# Altium PCB STM32F4.PcbDoc
Units mm, origin at the board's own origin, x right, y up, seen from the top; angles counter-clockwise.
Board outline 152.4 x 101.6 mm, 2 copper layers (Top Layer, Bottom Layer); 100 components, 104 nets, 539 pads, 0 vias.
Unrouted connection lines stored in the file: 299.
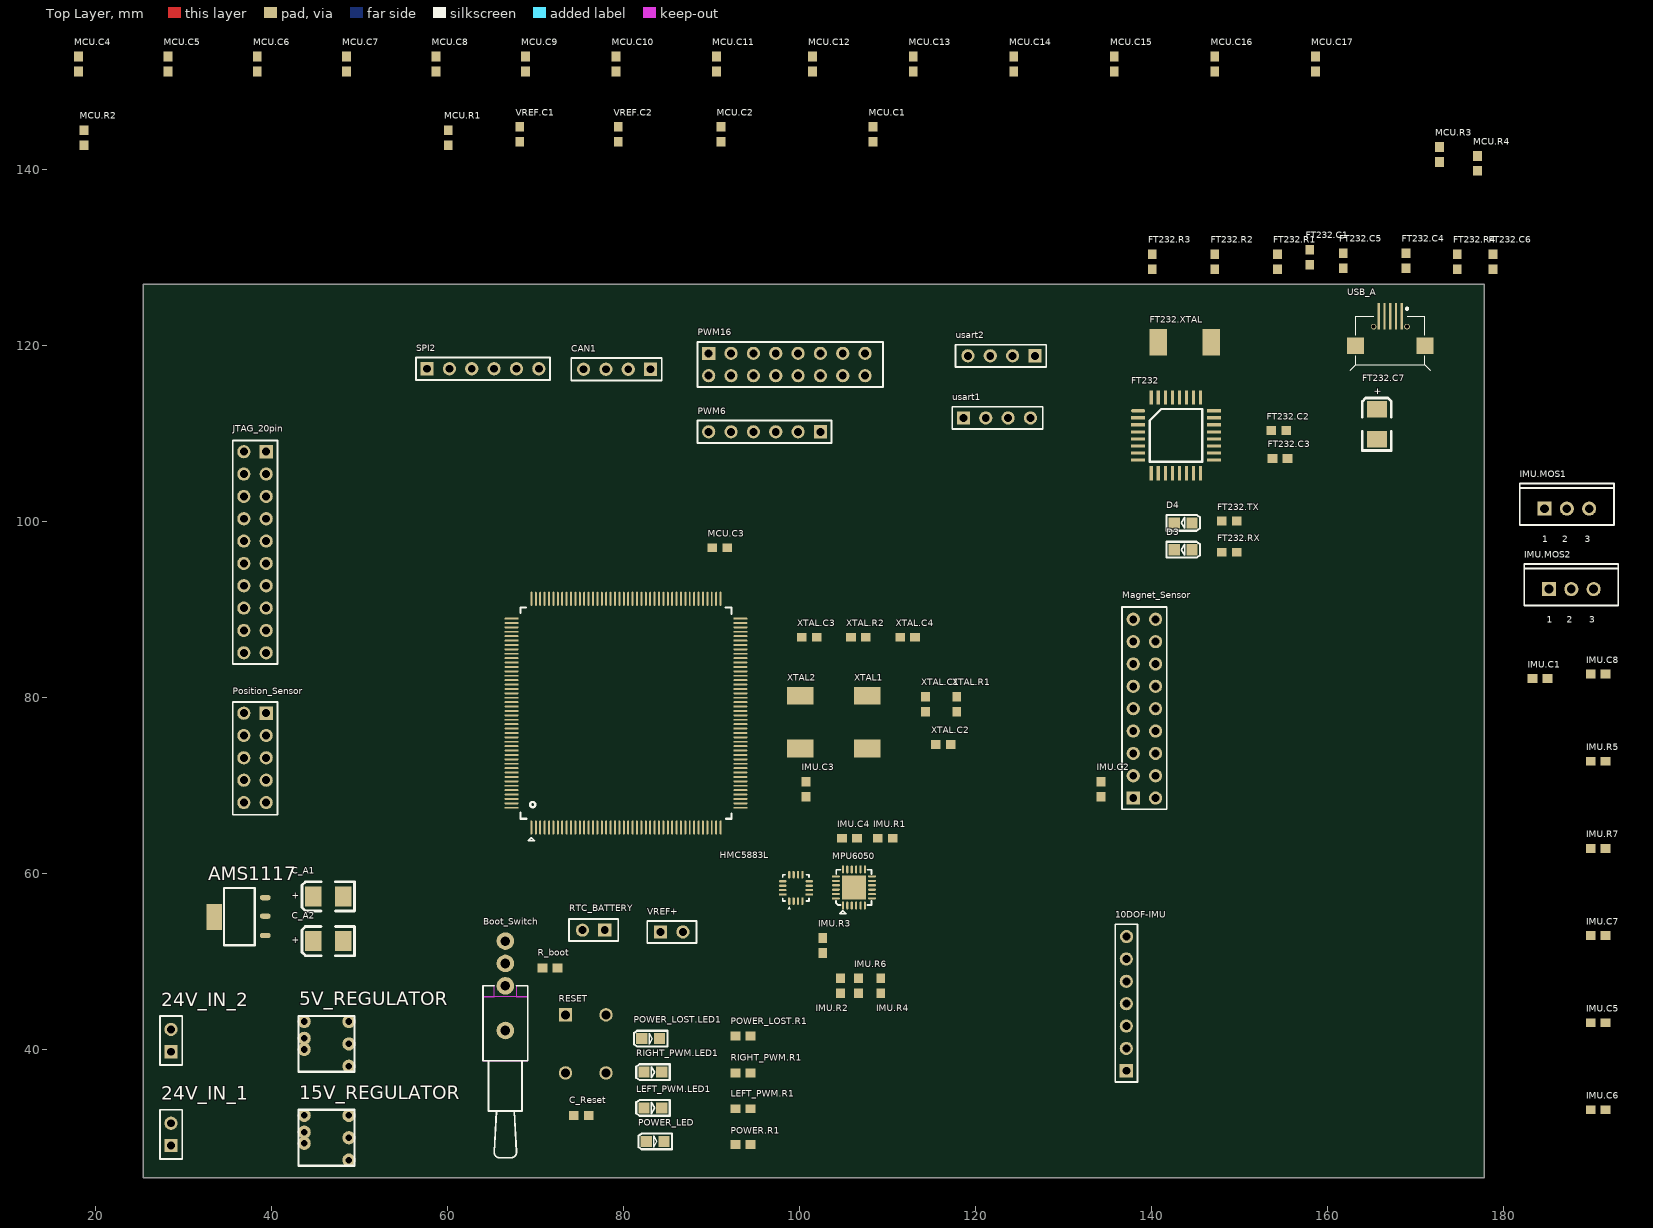
[diagram p0: Top Layer view]
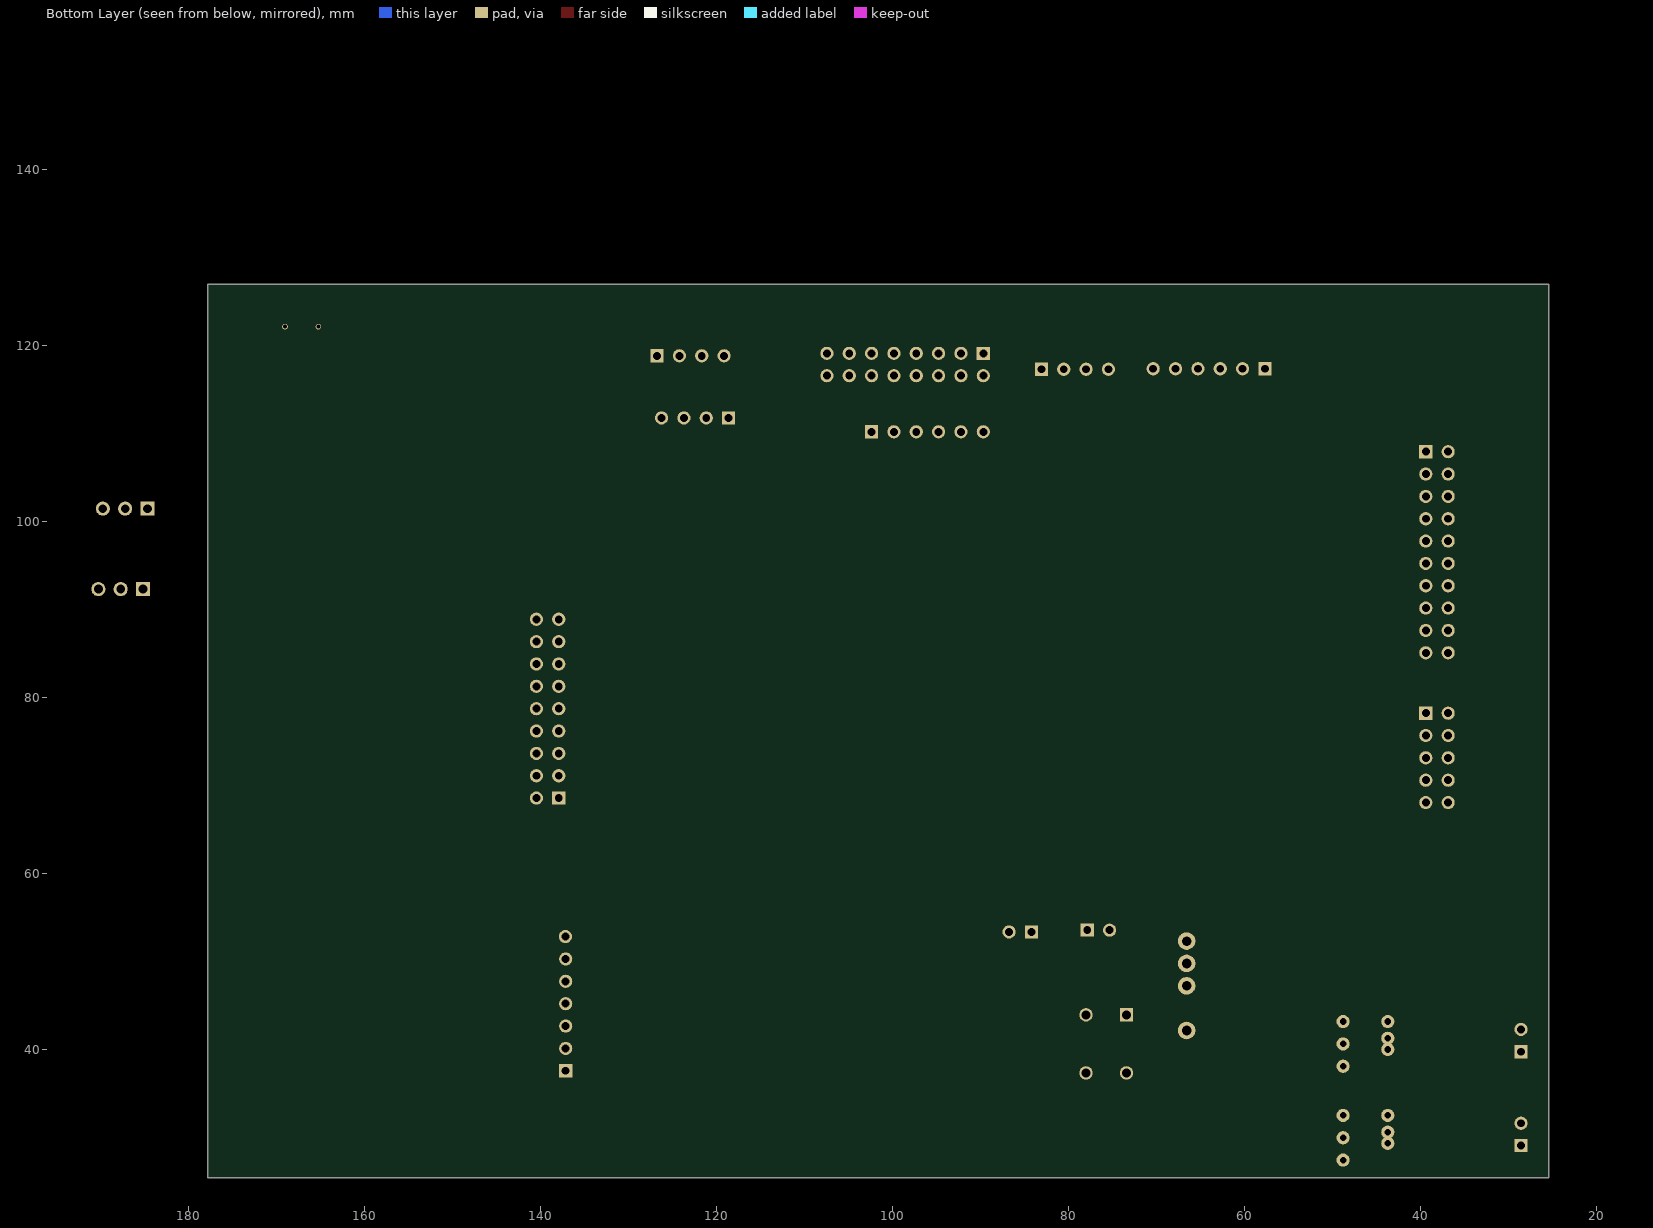
[diagram p1: Bottom Layer view, seen from below]

## Layer stack, top to bottom
Top Layer: signal copper 0.0356
Dielectric: dielectric 0.32, FR-4, Dk 4.8
Bottom Layer: signal copper 0.0356

## Board outline
25.4,25.4 177.8,25.4 177.8,127 25.4,127

## Design rules (kind name [scope] priority, off if disabled: settings)
Clearance [All] p1: gap=0.127
ComponentClearance [All] p1: gap=0.178 collisioncheckmode=3 verticalgap=0.178 showdistances=FALSE
HoleToHoleClearance [All] p1: gap=0.178 allowstackedmicrovias=TRUE
MinimumSolderMaskSliver [All] p1: minsoldermaskwidth=0
PolygonConnect [All] p1: connectstyle=Relief reliefconductorwidth=0.254 reliefentries=4 polygonreliefangle="90 Angle"
RoutingVias [All] p1: holewidth=0.711 width=1.27 viastyle="Through Hole" minholewidth=0.711 minwidth=1.27 maxholewidth=0.711 maxwidth=1.27
SilkToSilkClearance [All] p1: silktosilkclearance=0
SilkscreenOverComponentPads [All] p1: minsilkscreentomaskgap=0
SolderMaskExpansion [All] p1: expansion=0.102
TestPointUsage [All] p1: valid=0 allowmultiple=FALSE
Testpoint [All] p1: side=15 testpointundercomponent=TRUE minsize=1.016 maxsize=2.54 preferedsize=1.524 minholesize=0 maxholesize=1.016 preferedholesize=0.813 testpointgrid=0.025 style=1023 order=0-112345678
Width [All] p1: maxlimit=2.032 minlimit=0.203 preferedwidth=0.254
19 further rules are at their usual default settings.

## Components (designator, comment, footprint, x,y, rotation, side; value= is the part's Value field where it differs from the comment)
5V_REGULATOR "5V_REGULATOR" URA 46.228,40.64 r90 top
10DOF-IMU "*" HEADER7 137.16,45.212 r90 top
15V_REGULATOR "15V_REGULATOR" URA 46.228,29.972 r90 top
24V_IN_1 "*" Header2 28.448,30.48 r90 top
24V_IN_2 "*" Header2 28.448,41.148 r90 top
AMS1117 "AMS1117" AMS1117 36.068,54.864 r90 top
Boot_Switch "SW-SPDT" TL36WW15050 66.548,47.244 r270 top
C_A1 "Cap Pol2" 3528C/B 44.704,57.404 r0 top
C_A2 "Cap Pol2" 3528C/B 44.704,52.324 r0 top
C_Reset "Cap Semi" 1608[0603] 75.184,32.512 r0 top
CAN1 "CAN1" HEADER4 79.248,117.348 r180 top
D3 "LED3" LED 146.304,96.012 r180 top
D4 "LED0" LED 146.304,99.06 r180 top
FT232 "FT232" FT232 142.748,109.728 r0 top
FT232.C1 "33nF" 1608[0603] 157.988,130.048 r90 top
FT232.C2 "27pF" 1608[0603] 154.471,110.363 r0 top
FT232.C3 "27pF" 1608[0603] 154.598,107.188 r0 top
FT232.C4 "100nF" 1608[0603] 168.91,129.667 r90 top
FT232.C5 "100nF" 1608[0603] 161.798,129.667 r90 top
FT232.C6 "100nF" 1608[0603] 178.816,129.54 r270 top
FT232.C7 "Cap Pol2" 3528C/B 165.608,112.776 r270 top
FT232.R1 "Res Semi" J1-0603 154.305,129.54 r90 top
FT232.R2 "Res Semi" J1-0603 147.193,129.54 r90 top
FT232.R3 "Res Semi" J1-0603 140.081,129.54 r90 top
FT232.R4 "Res1" 1608[0603] 174.752,129.54 r90 top
FT232.RX "Res1" 1608[0603] 148.844,96.52 r180 top
FT232.TX "Res1" 1608[0603] 148.844,100.076 r180 top
FT232.XTAL "6MHz" xtal 143.764,120.396 r0 top
HMC5883L "HMC5883L" HMC5883L 99.568,58.42 r0 top
IMU.C1 "Cap Semi" 1608[0603] 184.15,82.169 r0 top
IMU.C2 "Cap Semi" 1608[0603] 134.239,69.596 r90 top
IMU.C3 "Cap Semi" 1608[0603] 100.711,69.596 r90 top
IMU.C4 "Cap Semi" 1608[0603] 105.664,64.008 r0 top
IMU.C5 "Cap Semi" 1608[0603] 190.754,43.053 r0 top
IMU.C6 "Cap Semi" 1608[0603] 190.754,33.147 r0 top
IMU.C7 "Cap Semi" 1608[0603] 190.754,52.959 r0 top
IMU.C8 "Cap Semi" 1608[0603] 190.754,82.677 r0 top
IMU.MOS1 "NDC7002N" TO-220AB 187.198,101.473 r0 top
IMU.MOS2 "NDC7002N" TO-220AB 187.706,92.329 r0 top
IMU.R1 "Res Semi" J1-0603 109.728,64.008 r180 top
IMU.R2 "Res Semi" J1-0603 104.648,47.244 r90 top
IMU.R3 "Res Semi" J1-0603 102.616,51.816 r270 top
IMU.R4 "Res Semi" J1-0603 109.22,47.244 r90 top
IMU.R5 "Res Semi" J1-0603 190.754,72.771 r0 top
IMU.R6 "Res Semi" J1-0603 106.68,47.244 r90 top
IMU.R7 "Res Semi" J1-0603 190.754,62.865 r0 top
JTAG_20pin "*" JTAG 38.1,96.52 r270 top
LEFT_PWM.LED1 "LED1" LED 80.606,34.163 r0 top
LEFT_PWM.R1 "Res Semi" J1-0603 93.56,33.274 r180 top
Magnet_Sensor "Magnet_Sensor" HEADER18 139.192,78.74 r90 top
MCU.C1 "Cap Semi" 1608[0603] 108.331,144.018 r90 top
MCU.C2 "Cap Semi" 1608[0603] 91.059,144.018 r90 top
MCU.C3 "Cap Semi" 1608[0603] 90.932,97.028 r180 top
MCU.C4 "Cap Semi" 1608[0603] 18.034,152.019 r90 top
MCU.C5 "Cap Semi" 1608[0603] 28.194,152.019 r90 top
MCU.C6 "Cap Semi" 1608[0603] 38.354,152.019 r90 top
MCU.C7 "Cap Semi" 1608[0603] 48.514,152.019 r90 top
MCU.C8 "Cap Semi" 1608[0603] 58.674,152.019 r90 top
MCU.C9 "Cap Semi" 1608[0603] 68.834,152.019 r90 top
MCU.C10 "Cap Semi" 1608[0603] 79.121,152.019 r90 top
MCU.C11 "Cap Semi" 1608[0603] 90.551,152.019 r90 top
MCU.C12 "Cap Semi" 1608[0603] 101.473,152.019 r90 top
MCU.C13 "Cap Semi" 1608[0603] 112.903,152.019 r90 top
MCU.C14 "Cap Semi" 1608[0603] 124.333,152.019 r90 top
MCU.C15 "Cap Semi" 1608[0603] 135.763,152.019 r90 top
MCU.C16 "Cap Semi" 1608[0603] 147.193,152.019 r90 top
MCU.C17 "Cap Semi" 1608[0603] 158.623,152.019 r90 top
MCU.R1 "Res Semi" J1-0603 60.071,143.637 r90 top
MCU.R2 "Res Semi" J1-0603 18.669,143.637 r90 top
MCU.R3 "Res Semi" J1-0603 172.72,141.732 r90 top
MCU.R4 "Res Semi" J1-0603 177.038,140.716 r90 top
MPU6050 "*" MPU6050 106.172,58.42 r90 top
Position_Sensor "Position_Sensor" HEADER10 38.1,73.152 r270 top
POWER.R1 "Res Semi" J1-0603 93.56,29.21 r180 top
POWER_LED "LED1" LED 80.86,30.353 r0 top
POWER_LOST.LED1 "LED1" LED 80.352,42.037 r0 top
POWER_LOST.R1 "Res Semi" J1-0603 93.56,41.529 r180 top
PWM6 "Header 6" HEADER6 96.012,110.236 r180 top
PWM16 "PWM16" HEADER16 98.552,117.856 r0 top
R_boot "47k" J1-0603 71.628,49.276 r0 top
RESET "6x4.5mm Button" Switch 75.692,40.64 r0 top
RIGHT_PWM.LED1 "LED1" LED 80.606,38.227 r0 top
RIGHT_PWM.R1 "Res Semi" J1-0603 93.56,37.338 r180 top
RTC_BATTERY "*" Header2 76.454,53.467 r180 top
SPI2 "SPI2" HEADER6 64.008,117.348 r0 top
usart1 "Usart1" HEADER4 122.428,111.76 r0 top
usart2 "Usart2" HEADER4 122.936,118.872 r180 top
USB_A "USB_A" Micro_USB 167.132,117.856 r270 top
VREF+ "*" Header2 85.598,53.467 r0 top
VREF.C1 "Cap Semi" 1608[0603] 68.199,144.018 r90 top
VREF.C2 "Cap Semi" 1608[0603] 79.375,144.018 r90 top
XTAL1 "32.678KHz" xtal 107.696,77.216 r90 top
XTAL2 "8MHz" xtal 100.076,77.216 r270 top
XTAL.C1 "Cap Semi" 1608[0603] 114.3,79.248 r90 top
XTAL.C2 "Cap Semi" 1608[0603] 116.332,74.676 r0 top
XTAL.C3 "Cap Semi" 1608[0603] 101.092,86.868 r180 top
XTAL.C4 "Cap Semi" 1608[0603] 112.268,86.868 r180 top
XTAL.R1 "Res Semi" J1-0603 117.856,79.248 r90 top
XTAL.R2 "Res Semi" J1-0603 106.68,86.868 r180 top
? "*" U-LQFP176-0.5 80.264,78.232 r0 top

## Footprints (in the part's own frame and the unit in brackets; to place one, negate y for a bottom-side part, rotate by r counter-clockwise, add the part's x,y. Pads: shape width x height; smd on the part's side, far side on the other; paste and mask are expansions set on the pad)
1608[0603] [mm] "Chip Capacitor; Body 1.6 x 0.8 mm (LxW typ)"
  rect 1.1x1 smd: 1(-0.85,0) 2(0.85,0)
3528C/B [mm]
  rect 1.9x2.28 smd: 1(0,0) 2(3.42,0)
  silkscreen extent -1.27,-1.65 4.7,1.65
AMS1117 [mm]
  rrect100% 0.604x1.231 smd mask+0.07: 1(-1.9,-3.2) 2(0.3,-3.2) 3(2.4,-3.2)
  rect 3x1.75 smd mask+0.07: 4(0.2,2.6)
  silkscreen extent -3,-2 3.5,1.5
FT232 [mm]
  oval 1.6x0.37 smd: 1(-4.274,2.87)
  rect 1.6x0.37 smd: 2(-4.274,2.07) 3(-4.274,1.27) 4(-4.274,0.47) 5(-4.274,-0.33) 6(-4.274,-1.13) 7(-4.274,-1.93) 8(-4.274,-2.73) 17(4.326,-2.73) 18(4.326,-1.93) 19(4.326,-1.13) 20(4.326,-0.33) 21(4.326,0.47) 22(4.326,1.27) 23(4.326,2.07) 24(4.326,2.87)
  rect 0.37x1.6 smd: 9(-2.774,-4.23) 10(-1.974,-4.23) 11(-1.174,-4.23) 12(-0.374,-4.23) 13(0.426,-4.23) 14(1.226,-4.23) 15(2.026,-4.23) 16(2.826,-4.23) 25(2.826,4.37) 26(2.026,4.37) 27(1.226,4.37) 28(0.426,4.37) 29(-0.374,4.37) 30(-1.174,4.37) 31(-1.974,4.37) 32(-2.774,4.37)
  silkscreen extent -2.97,-2.92 3.02,3.06
Header2 [mm]
  rect 1.5x1.5 hole 0.9: 1(-1.399,-0.101)
  round 1.5 hole 0.9: 2(1.141,-0.101)
  silkscreen extent -2.92,-1.37 2.67,1.14
HEADER4 [mm]
  rect 1.5x1.5 hole 0.9: 1(-3.812,0.026)
  round 1.5 hole 0.9: 2(-1.272,0.026) 3(1.268,0.026) 4(3.808,0.026)
  silkscreen extent -5.08,-1.24 5.21,1.3
HEADER6 [mm]
  rect 1.5x1.5 hole 0.9: 1(-6.352,0.026)
  round 1.5 hole 0.9: 2(-3.812,0.026) 3(-1.272,0.026) 4(1.268,0.026) 5(3.808,0.026) 6(6.348,0.026)
  silkscreen extent -7.62,-1.24 7.62,1.3
HEADER7 [mm]
  rect 1.5x1.5 hole 0.9: 1(-7.622,0.026)
  round 1.5 hole 0.9: 2(-5.082,0.026) 3(-2.542,0.026) 4(-0.002,0.026) 5(2.538,0.026) 6(5.078,0.026) 7(7.62,0)
  silkscreen extent -8.89,-1.24 9.02,1.3
HEADER10 [mm]
  rect 1.5x1.5 hole 0.9: 1(-5.08,1.27)
  round 1.5 hole 0.9: 2(-5.08,-1.27) 3(-2.54,1.27) 4(-2.54,-1.27) 5(0,1.27) 6(0,-1.27) 7(2.54,1.27) 8(2.54,-1.27) 9(5.08,1.27) 10(5.08,-1.27)
  silkscreen extent -6.35,-2.54 6.48,2.57
HEADER16 [mm]
  rect 1.5x1.5 hole 0.9: 1(-8.89,1.27)
  round 1.5 hole 0.9: 2(-8.89,-1.27) 3(-6.35,1.27) 4(-6.35,-1.27) 5(-3.81,1.27) 6(-3.81,-1.27) 7(-1.27,1.27) 8(-1.27,-1.27) 9(1.27,1.27) 10(1.27,-1.27) 11(3.81,1.27) 12(3.81,-1.27) 13(6.35,1.27) 14(6.35,-1.27) 15(8.89,1.27) 16(8.89,-1.27)
  silkscreen extent -10.16,-2.54 10.92,2.57
HEADER18 [mm]
  rect 1.5x1.5 hole 0.9: 1(-10.16,1.27)
  round 1.5 hole 0.9: 2(-10.16,-1.27) 3(-7.62,1.27) 4(-7.62,-1.27) 5(-5.08,1.27) 6(-5.08,-1.27) 7(-2.54,1.27) 8(-2.54,-1.27) 9(0,1.27) 10(0,-1.27) 11(2.54,1.27) 12(2.54,-1.27) 13(5.08,1.27) 14(5.08,-1.27) 15(7.62,1.27) 16(7.62,-1.27) 17(10.16,1.27) 18(10.16,-1.27)
  silkscreen extent -11.43,-2.54 11.56,2.57
HMC5883L [mil]
  oval 10x34 smd: 1(-29.53,-61.02) 2(-9.84,-61.02) 3(9.84,-61.02) 4(29.53,-61.02) 9(29.53,57.09) 10(9.84,57.09) 11(-9.84,57.09) 12(-29.53,57.09)
  oval 34x10 smd: 5(60.12,-31.5) 6(60.12,-11.81) 7(60.12,7.87) 8(60.12,27.56) 13(-59.06,27.56) 14(-59.06,7.87) 15(-59.06,-11.81) 16(-59.06,-31.5)
  silkscreen extent -59,-99 59,57
J1-0603 [mm] "Chip Resistor; Body 1.6 x 0.8 mm (LxW typ)"
  rect 1.1x1 smd: 1(-0.85,0) 2(0.85,0)
JTAG [mm]
  rect 1.5x1.5 hole 0.9: 1(-11.43,1.27)
  round 1.5 hole 0.9: 2(-11.43,-1.27) 3(-8.89,1.27) 4(-8.89,-1.27) 5(-6.35,1.27) 6(-6.35,-1.27) 7(-3.81,1.27) 8(-3.81,-1.27) 9(-1.27,1.27) 10(-1.27,-1.27) 11(1.27,1.27) 12(1.27,-1.27) 13(3.81,1.27) 14(3.81,-1.27) 15(6.35,1.27) 16(6.35,-1.27) 17(8.89,1.27) 18(8.89,-1.27) 19(11.43,1.27) 20(11.43,-1.27)
  silkscreen extent -12.7,-2.54 12.7,2.57
LED [mm]
  rect 1.27x1.27 smd: 1(1.7,-0.8) 2(3.732,-0.8)
  silkscreen extent 0.81,-1.69 4.62,0.09
Micro_USB [mm]
  rect 3x0.25 smd: 1(-5.508,-1.3) 2(-5.508,-0.65) 3(-5.508,0) 4(-5.508,0.65) 5(-5.508,1.3)
  round 0.635 hole 0.457 unplated: MH1(-4.3,1.9) MH2(-4.3,-1.9)
  rect 1.9x1.9 smd: ""(-2.15,3.95) ""(-2.15,-3.95)
  silkscreen extent -6.47,-4.57 0.63,4.57
MPU6050 [mm]
  rect 0.9x0.25 smd: 1(-2.05,1.25)
  oval 0.9x0.25 smd: 2(-2.05,0.75) 3(-2.05,0.25) 4(-2.05,-0.25) 5(-2.05,-0.75) 6(-2.05,-1.25) 13(2.05,-1.25) 14(2.05,-0.75) 15(2.05,-0.25) 16(2.05,0.25) 17(2.05,0.75) 18(2.05,1.25)
  oval 0.25x0.9 smd: 7(-1.25,-2.05) 8(-0.75,-2.05) 9(-0.25,-2.05) 10(0.25,-2.05) 11(0.75,-2.05) 12(1.25,-2.05) 19(1.25,2.05) 20(0.75,2.05) 21(0.25,2.05) 22(-0.25,2.05) 23(-0.75,2.05) 24(-1.25,2.05)
  rect 2.7x2.7 smd: 25(0,0)
  silkscreen extent -3,-2 2,2.03
Switch [mm]
  round 1.524 hole 1: 1(-2.3,-3.3) 2(2.3,-3.3) 2(2.3,3.3)
  rect 1.524x1.524 hole 1: 1(-2.3,3.3)
TL36WW15050 [mm] "SPDT Subminiature Toggle Switch, Right Angle Mounting, Vertical Actuation"
  round 2 hole 1.1: 1(0,0) 2(-2.54,0) 3(-5.08,0) M(5.08,0)
  Top Layer keep-out region: 1.27,2.54 1.27,-2.54 8.509,-2.54 8.509,2.54
  Top Layer keep-out region: 0,2.54 0,1.27 1.27,1.27 1.27,2.54
  Top Layer keep-out region: 0,-1.27 0,-2.54 1.27,-2.54 1.27,-1.27
  silkscreen extent 0,-2.54 19.56,2.54
TO-220AB [mm] "TO, Thru-Hole, Vertical, Heatsink Mounted; 3 In-Line Leads; Pitch 2.54 mm"
  rect 1.6x1.6 hole 1: 1(-2.54,0)
  round 1.6 hole 1: 2(0,0) 3(2.54,0)
  silkscreen extent -5.35,-1.85 5.35,2.85
U-LQFP176-0.5 [mm]
  oval 0.22x1.6 smd: 1(-10.75,-13) 2(-10.25,-13) 3(-9.75,-13) 4(-9.25,-13) 5(-8.75,-13) 6(-8.25,-13) 7(-7.75,-13) 8(-7.25,-13) 9(-6.75,-13) 10(-6.25,-13) 11(-5.75,-13) 12(-5.25,-13) 13(-4.75,-13) 14(-4.25,-13) 15(-3.75,-13) 16(-3.25,-13) 17(-2.75,-13) 18(-2.25,-13) 19(-1.75,-13) 20(-1.25,-13) 21(-0.75,-13) 22(-0.25,-13) 23(0.25,-13) 24(0.75,-13) 25(1.25,-13) 26(1.75,-13) 27(2.25,-13) 28(2.75,-13) 29(3.25,-13) 30(3.75,-13) 31(4.25,-13) 32(4.75,-13) 33(5.25,-13) 34(5.75,-13) 35(6.25,-13) 36(6.75,-13) 37(7.25,-13) 38(7.75,-13) 39(8.25,-13) 40(8.75,-13) 41(9.25,-13) 42(9.75,-13) 43(10.25,-13) 44(10.75,-13) 89(10.75,13) 90(10.25,13) 91(9.75,13) 92(9.25,13) 93(8.75,13) 94(8.25,13) 95(7.75,13) 96(7.25,13) 97(6.75,13) 98(6.25,13) 99(5.75,13) 100(5.25,13) 101(4.75,13) 102(4.25,13) 103(3.75,13) 104(3.25,13) 105(2.75,13) 106(2.25,13) 107(1.75,13) 108(1.25,13) 109(0.75,13) 110(0.25,13) 111(-0.25,13) 112(-0.75,13) 113(-1.25,13) 114(-1.75,13) 115(-2.25,13) 116(-2.75,13) 117(-3.25,13) 118(-3.75,13) 119(-4.25,13) 120(-4.75,13) 121(-5.25,13) 122(-5.75,13) 123(-6.25,13) 124(-6.75,13) 125(-7.25,13) 126(-7.75,13) 127(-8.25,13) 128(-8.75,13) 129(-9.25,13) 130(-9.75,13) 131(-10.25,13) 132(-10.75,13)
  oval 1.6x0.22 smd: 45(13,-10.75) 46(13,-10.25) 47(13,-9.75) 48(13,-9.25) 49(13,-8.75) 50(13,-8.25) 51(13,-7.75) 52(13,-7.25) 53(13,-6.75) 54(13,-6.25) 55(13,-5.75) 56(13,-5.25) 57(13,-4.75) 58(13,-4.25) 59(13,-3.75) 60(13,-3.25) 61(13,-2.75) 62(13,-2.25) 63(13,-1.75) 64(13,-1.25) 65(13,-0.75) 66(13,-0.25) 67(13,0.25) 68(13,0.75) 69(13,1.25) 70(13,1.75) 71(13,2.25) 72(13,2.75) 73(13,3.25) 74(13,3.75) 75(13,4.25) 76(13,4.75) 77(13,5.25) 78(13,5.75) 79(13,6.25) 80(13,6.75) 81(13,7.25) 82(13,7.75) 83(13,8.25) 84(13,8.75) 85(13,9.25) 86(13,9.75) 87(13,10.25) 88(13,10.75) 133(-13,10.75) 134(-13,10.25) 135(-13,9.75) 136(-13,9.25) 137(-13,8.75) 138(-13,8.25) 139(-13,7.75) 140(-13,7.25) 141(-13,6.75) 142(-13,6.25) 143(-13,5.75) 144(-13,5.25) 145(-13,4.75) 146(-13,4.25) 147(-13,3.75) 148(-13,3.25) 149(-13,2.75) 150(-13,2.25) 151(-13,1.75) 152(-13,1.25) 153(-13,0.75) 154(-13,0.25) 155(-13,-0.25) 156(-13,-0.75) 157(-13,-1.25) 158(-13,-1.75) 159(-13,-2.25) 160(-13,-2.75) 161(-13,-3.25) 162(-13,-3.75) 163(-13,-4.25) 164(-13,-4.75) 165(-13,-5.25) 166(-13,-5.75) 167(-13,-6.25) 168(-13,-6.75) 169(-13,-7.25) 170(-13,-7.75) 171(-13,-8.25) 172(-13,-8.75) 173(-13,-9.25) 174(-13,-9.75) 175(-13,-10.25) 176(-13,-10.75)
  silkscreen extent -12,-14.5 12,12
URA [mm]
  round 1.5 hole 0.75 paste+0.1 mask+0.1: 1(0.635,2.54) 2(-0.635,2.54) 3(-2.54,-2.54) 4(0,-2.54) 5(2.54,-2.54) 6(2.54,2.54)
  silkscreen extent -3.18,-3.18 3.18,3.18
xtal [mm]
  rect 2x3 smd: 1(-3,0) 2(3,0)

## Part data
5V_REGULATOR: library part 5V_REGULATOR_1, "Header, 6-Pin"
10DOF-IMU: library part 10DOF-IMU
15V_REGULATOR CAN1 Magnet_Sensor Position_Sensor PWM16 SPI2: "Header, 6-Pin"
24V_IN_1 24V_IN_2: library part 24V_IN
Boot_Switch: "SPDT Subminiature Toggle Switch, Right Angle Mounting, Vertical Actuation"
C_A1 C_A2 FT232.C7: "Polarized Capacitor (Axial)"
C_Reset IMU.C1 IMU.C2 IMU.C3 IMU.C4 IMU.C5 IMU.C6 IMU.C7 IMU.C8 MCU.C1 MCU.C2 MCU.C3 MCU.C4 MCU.C5 MCU.C6 MCU.C7 MCU.C8 MCU.C9 MCU.C10 MCU.C11 MCU.C12 MCU.C13 MCU.C14 MCU.C15 MCU.C16 MCU.C17 VREF.C1 VREF.C2 XTAL.C1 XTAL.C2 XTAL.C3 XTAL.C4: "Capacitor (Semiconductor SIM Model)"
D3: library part LED0, "Typical INFRARED GaAs LED"
D4: "Typical INFRARED GaAs LED"
FT232: library part FT232BM
FT232.C1 FT232.C2 FT232.C3 FT232.C4 FT232.C5 FT232.C6: library part CAP, "Capacitor"
FT232.R1 FT232.R2 FT232.R3 IMU.R1 IMU.R2 IMU.R3 IMU.R4 IMU.R5 IMU.R6 IMU.R7 LEFT_PWM.R1 MCU.R1 MCU.R2 MCU.R3 MCU.R4 POWER.R1 POWER_LOST.R1 RIGHT_PWM.R1 XTAL.R1 XTAL.R2: "Semiconductor Resistor"
FT232.R4 FT232.RX FT232.TX: "Resistor"
FT232.XTAL XTAL1 XTAL2: library part XTAL, "Crystal Oscillator"
IMU.MOS1 IMU.MOS2: library part NMOS-2, "N-Channel Power MOSFET"
JTAG_20pin: library part JTAG_20pin
LEFT_PWM.LED1 POWER_LED POWER_LOST.LED1 RIGHT_PWM.LED1: "Typical RED GaAs LED"
MPU6050: library part MPU6050
PWM6: library part PWM6, "Header, 6-Pin"
R_boot: library part "Res Semi", "Semiconductor Resistor"
RESET: library part SW-PB, "Switch"
RTC_BATTERY VREF+: library part Header2
usart1: library part Usart2
?: library part STM32F407IGT6

## Nets (pads, with @x,y where several pads share a name; then routed paths per layer and width w, separated by ;. In a path a pad name is that pad's centre, name@x,y a point inside that pad or via, vN(x,y) a via of type N, cw(c..) or ccw(c..) an arc to the next point about the centre after c; other vN are vias at no path point)
5V: 5V_REGULATOR.3 AMS1117.3 C_A1.1 FT232.3 FT232.4 FT232.26 FT232.C6.2 FT232.C7.1 FT232.R4.1 PWM16.2 usart1.4 usart2.4 USB_A.1
15V: 15V_REGULATOR.3 Magnet_Sensor.18 Position_Sensor.10 PWM6.6 PWM16.1
BOOT: ?.166 R_boot.2
CAN1_RX: ?.11 CAN1.3
CAN1_TX: ?.128 CAN1.4
D+: FT232.R2.2 USB_A.3
D-: FT232.R1.2 USB_A.2
EXT_SCL: 10DOF-IMU.4 ?.45 IMU.MOS1.2 IMU.R4.1
EXT_SDA: 10DOF-IMU.3 ?.46 IMU.MOS2.2 IMU.R5.1
GND: 5V_REGULATOR.5 10DOF-IMU.2 15V_REGULATOR.5 ?.14 ?.22 ?.37 ?.48 ?.61 ?.71 ?.90 ?.102 ?.113 ?.126 ?.135 ?.148 ?.158 AMS1117.1 Boot_Switch.3 C_A1.2 C_A2.2 C_Reset.1 CAN1.2 FT232.9 FT232.14 FT232.17 FT232.29 FT232.31 FT232.C1.2 FT232.C2.2 FT232.C3.2 FT232.C4.2 FT232.C5.1 FT232.C6.1 FT232.C7.2 HMC5883L.7 HMC5883L.9 HMC5883L.11 IMU.C1.1 IMU.C2.1 IMU.C3.1 IMU.C4.1 IMU.C5.2 IMU.C6.2 IMU.C7.2 IMU.R1.2 JTAG_20pin.4 JTAG_20pin.6 JTAG_20pin.8 JTAG_20pin.10 JTAG_20pin.12 JTAG_20pin.14 JTAG_20pin.16 JTAG_20pin.18 JTAG_20pin.20 Magnet_Sensor.17 MCU.C1.1 MCU.C2.1 MCU.C3.1 MCU.C4.1 MCU.C5.1 MCU.C6.1 MCU.C7.1 MCU.C8.1 MCU.C9.1 MCU.C10.1 MCU.C11.1 MCU.C12.1 MCU.C13.1 MCU.C14.1 MCU.C15.1 MCU.C16.1 MCU.C17.1 MPU6050.1 MPU6050.9 MPU6050.18 Position_Sensor.9 POWER_LED.2 PWM6.5 PWM16.3 RESET.1 SPI2.2 usart1.3 usart2.3 USB_A.5 VREF.C1.1 VREF.C2.1 XTAL.C1.1 XTAL.C2.1 XTAL.C3.1 XTAL.C4.1
HMC_DRDY: 10DOF-IMU.7 HMC5883L.15
JTCK: ?.137 JTAG_20pin.7
JTDI: ?.138 JTAG_20pin.5
JTDO: ?.161 JTAG_20pin.13
JTMS: ?.124 JTAG_20pin.9
LEFT_PWM_LED: ?.43 LEFT_PWM.LED1.2
MAG1: ?.32 Magnet_Sensor.1
MAG2: ?.33 Magnet_Sensor.2
MAG3: ?.34 Magnet_Sensor.3
MAG4: ?.35 Magnet_Sensor.4
MAG5: ?.54 Magnet_Sensor.5
MAG6: ?.55 Magnet_Sensor.6
MAG7: ?.8 Magnet_Sensor.7
MAG8: ?.85 Magnet_Sensor.8
MAG9: ?.86 Magnet_Sensor.9
MAG10: ?.87 Magnet_Sensor.10
MAG11: ?.88 Magnet_Sensor.11
MAG12: ?.89 Magnet_Sensor.12
MAG13: ?.129 Magnet_Sensor.13
MAG14: ?.130 Magnet_Sensor.14
MAG15: ?.173 Magnet_Sensor.15
MAG16: ?.174 Magnet_Sensor.16
MPU_FSYNC: 10DOF-IMU.6
MPU_INT: 10DOF-IMU.5 ?.83 MPU6050.12
Net5V_REGULATOR_1: 5V_REGULATOR.1 24V_IN_2.2
Net5V_REGULATOR_2: 5V_REGULATOR.2 24V_IN_2.1
Net15V_REGULATOR_1: 15V_REGULATOR.1 24V_IN_1.2
Net15V_REGULATOR_2: 15V_REGULATOR.2 24V_IN_1.1
Net_6: ?.6 RTC_BATTERY.2
Net_81: ?.81 MCU.C2.2
Net_125: ?.125 MCU.C1.2
NetBoot_Switch_2: Boot_Switch.2 R_boot.1
NetD3_1: D3.1 FT232.RX.2
NetD4_1: D4.1 FT232.TX.2
NetFT232_5: FT232.5 FT232.R3.1
NetFT232_6: FT232.6 FT232.C1.1
NetFT232_7: FT232.7 FT232.R2.1 FT232.R3.2
NetFT232_8: FT232.8 FT232.R1.1
NetFT232_20: FT232.20 FT232.21
NetFT232_22: FT232.22 FT232.23
NetFT232_27: FT232.27 FT232.C2.1 FT232.XTAL.2
NetFT232_28: FT232.28 FT232.C3.1 FT232.XTAL.1
NetFT232_30: FT232.30 FT232.C4.1 FT232.R4.2
NetHMC5883L_8: HMC5883L.8 IMU.C8.2
NetHMC5883L_10: HMC5883L.10 IMU.C7.1
NetHMC5883L_12: HMC5883L.12 IMU.C8.1
NetIMU.C2_2: IMU.C2.2 MPU6050.10
NetIMU.C3_2: IMU.C3.2 MPU6050.20
NetIMU.R1_1: IMU.R1.1 MPU6050.11
NetLEFT_PWM.LED1_1: LEFT_PWM.LED1.1 LEFT_PWM.R1.2
NetMCU.R1_2: MCU.R1.2 XTAL1.2 XTAL.C1.2 XTAL.R1.2
NetMCU.R2_2: MCU.R2.2 XTAL1.1 XTAL.C2.2 XTAL.R1.1
NetMCU.R3_2: MCU.R3.2 XTAL2.2 XTAL.C3.2 XTAL.R2.2
NetMCU.R4_2: MCU.R4.2 XTAL2.1 XTAL.C4.2 XTAL.R2.1
NetPOWER.R1_2: POWER.R1.2 POWER_LED.1
NetPOWER_LOST.LED1_1: POWER_LOST.LED1.1 POWER_LOST.R1.2
NetRIGHT_PWM.LED1_1: RIGHT_PWM.LED1.1 RIGHT_PWM.R1.2
NJRST: ?.162 JTAG_20pin.3
OSC32_IN: ?.9 MCU.R1.1
OSC32_OUT: ?.10 MCU.R2.1
OSC_IN: ?.29 MCU.R3.1
OSC_OUT: ?.30 MCU.R4.1
POS1: ?.175 Position_Sensor.1
POS7: ?.176 Position_Sensor.7
POS8: ?.7 Position_Sensor.8
POWER_LOST_LED: ?.84 POWER_LOST.LED1.2
PWM1_4PIN: ?.115 PWM6.1
PWM1_8PIN: ?.93 PWM16.5
PWM2_4PIN: ?.116 PWM6.2
PWM2_8PIN: ?.119 PWM16.6
PWM3_4PIN: ?.117 PWM6.3 PWM16.10
PWM3_8PIN: ?.94 PWM16.7
PWM4_4PIN: ?.118 PWM6.4 PWM16.12
PWM4_8PIN: ?.120 PWM16.8
PWM5_8PIN: ?.56 PWM16.9
PWM7_8PIN: ?.57 PWM16.11
REEST: C_Reset.2 RESET.2
RESET: ?.31 JTAG_20pin.15
RIGHT_PWM_LED: ?.44 RIGHT_PWM.LED1.2
RXLED#: D3.2 FT232.11
SCL: HMC5883L.1 IMU.MOS1.3 IMU.R2.1 IMU.R6.1 MPU6050.23
SDA: HMC5883L.16 IMU.MOS2.3 IMU.R3.1 IMU.R7.1 MPU6050.24
SPI2_MISO: ?.133 SPI2.3
SPI2_MOSI: ?.134 SPI2.4
SPI2_NSS: ?.131 SPI2.6
SPI2_SCK: ?.132 SPI2.5
TXLED#: D4.2 FT232.12
USART1_RX: ?.165 FT232.25 usart1.2
USART1_TX: ?.164 FT232.24 usart1.1
USART2_RX: ?.47 usart2.2
USART2_TX: ?.42 usart2.1
VCC-3.3: IMU.R2.2 IMU.R3.2
VDD: 10DOF-IMU.1 ?.15 ?.23 ?.36 ?.39 ?.49 ?.62 ?.72 ?.82 ?.91 ?.103 ?.114 ?.127 ?.136 ?.149 ?.159 ?.172 AMS1117.2 AMS1117.4 Boot_Switch.1 C_A2.1 CAN1.1 FT232.13 FT232.C5.2 FT232.RX.1 FT232.TX.1 HMC5883L.2 HMC5883L.4 HMC5883L.13 IMU.C1.2 IMU.C4.2 IMU.C5.1 IMU.C6.1 IMU.MOS1.1 IMU.MOS2.1 IMU.R4.2 IMU.R5.2 IMU.R6.2 IMU.R7.2 JTAG_20pin.1 JTAG_20pin.2 LEFT_PWM.R1.1 MCU.C3.2 MCU.C4.2 MCU.C5.2 MCU.C6.2 MCU.C7.2 MCU.C8.2 MCU.C9.2 MCU.C10.2 MCU.C11.2 MCU.C12.2 MCU.C13.2 MCU.C14.2 MCU.C15.2 MCU.C16.2 MCU.C17.2 MPU6050.8 MPU6050.13 POWER.R1.1 POWER_LOST.R1.1 RIGHT_PWM.R1.1 RTC_BATTERY.1 SPI2.1 VREF+.2
VREF+: ?.38 VREF+.1 VREF.C1.2 VREF.C2.2
pads on no net: 5V_REGULATOR.4 5V_REGULATOR.6 15V_REGULATOR.4 15V_REGULATOR.6 ?.1 ?.2 ?.3 ?.4 ?.5 ?.12 ?.13 ?.16 ?.17 ?.18 ?.19 ?.20 ?.21 ?.24 ?.25 ?.26 ?.27 ?.28 ?.40 ?.41 ?.50 ?.51 ?.52 ?.53 ?.58 ?.59 ?.60 ?.63 ?.64 ?.65 ?.66 ?.67 ?.68 ?.69 ?.70 ?.73 ?.74 ?.75 ?.76 ?.77 ?.78 ?.79 ?.80 ?.92 ?.95 ?.96 ?.97 ?.98 ?.99 ?.100 ?.101 ?.104 ?.105 ?.106 ?.107 ?.108 ?.109 ?.110 ?.111 ?.112 ?.121 ?.122 ?.123 ?.139 ?.140 ?.141 ?.142 ?.143 ?.144 ?.145 ?.146 ?.147 ?.150 ?.151 ?.152 ?.153 ?.154 ?.155 ?.156 ?.157 ?.160 ?.163 ?.167 ?.168 ?.169 ?.170 ?.171 Boot_Switch.M FT232.1 FT232.2 FT232.10 FT232.15 FT232.16 FT232.18 FT232.19 FT232.32 HMC5883L.3 HMC5883L.5 HMC5883L.6 HMC5883L.14 JTAG_20pin.11 JTAG_20pin.17 JTAG_20pin.19 MPU6050.2 MPU6050.3 MPU6050.4 MPU6050.5 MPU6050.6 MPU6050.7 MPU6050.14 MPU6050.15 MPU6050.16 MPU6050.17 MPU6050.19 MPU6050.21 MPU6050.22 MPU6050.25 Position_Sensor.2 Position_Sensor.3 Position_Sensor.4 Position_Sensor.5 Position_Sensor.6 PWM16.4 PWM16.13 PWM16.14 PWM16.15 PWM16.16 USB_A. USB_A.4 USB_A.MH1 USB_A.MH2

## Text inside footprints (layer, text, board x,y; h text height)
C_A1: Top Overlay "+" at 42.291,57.15 h0.76
C_A2: Top Overlay "+" at 42.291,52.07 h0.76
FT232.C7: Top Overlay "+" at 165.354,115.189 h0.76 r270
IMU.MOS1: Top Overlay "3" at 189.238,97.648 h0.76; Top Overlay "1" at 184.408,97.648 h0.76; Top Overlay "2" at 186.698,97.648 h0.76
IMU.MOS2: Top Overlay "3" at 189.746,88.504 h0.76; Top Overlay "1" at 184.916,88.504 h0.76; Top Overlay "2" at 187.206,88.504 h0.76